# Altium PCB Motor_control.PcbDoc
Units mm, origin at the board's own origin, x right, y up, seen from the top; angles counter-clockwise.
Board outline 53.5 x 101.6 mm, 2 copper layers (Top Layer, Bottom Layer); 26 components, 36 nets, 158 pads, 7 vias.
Unrouted connection lines stored in the file: 2.
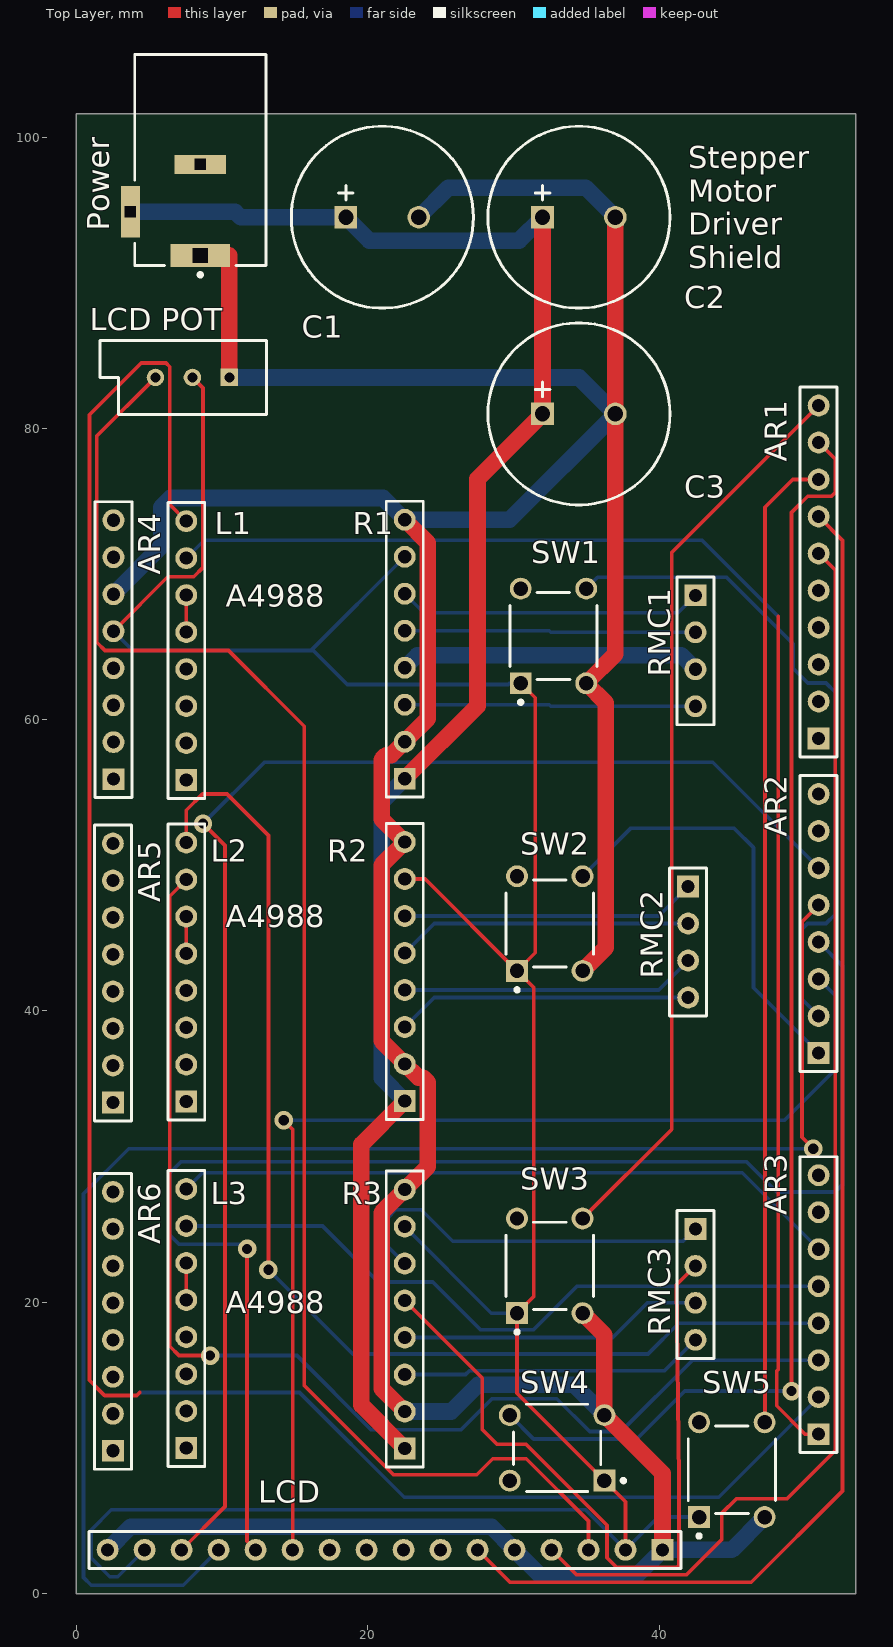
[diagram p0: Top Layer view]
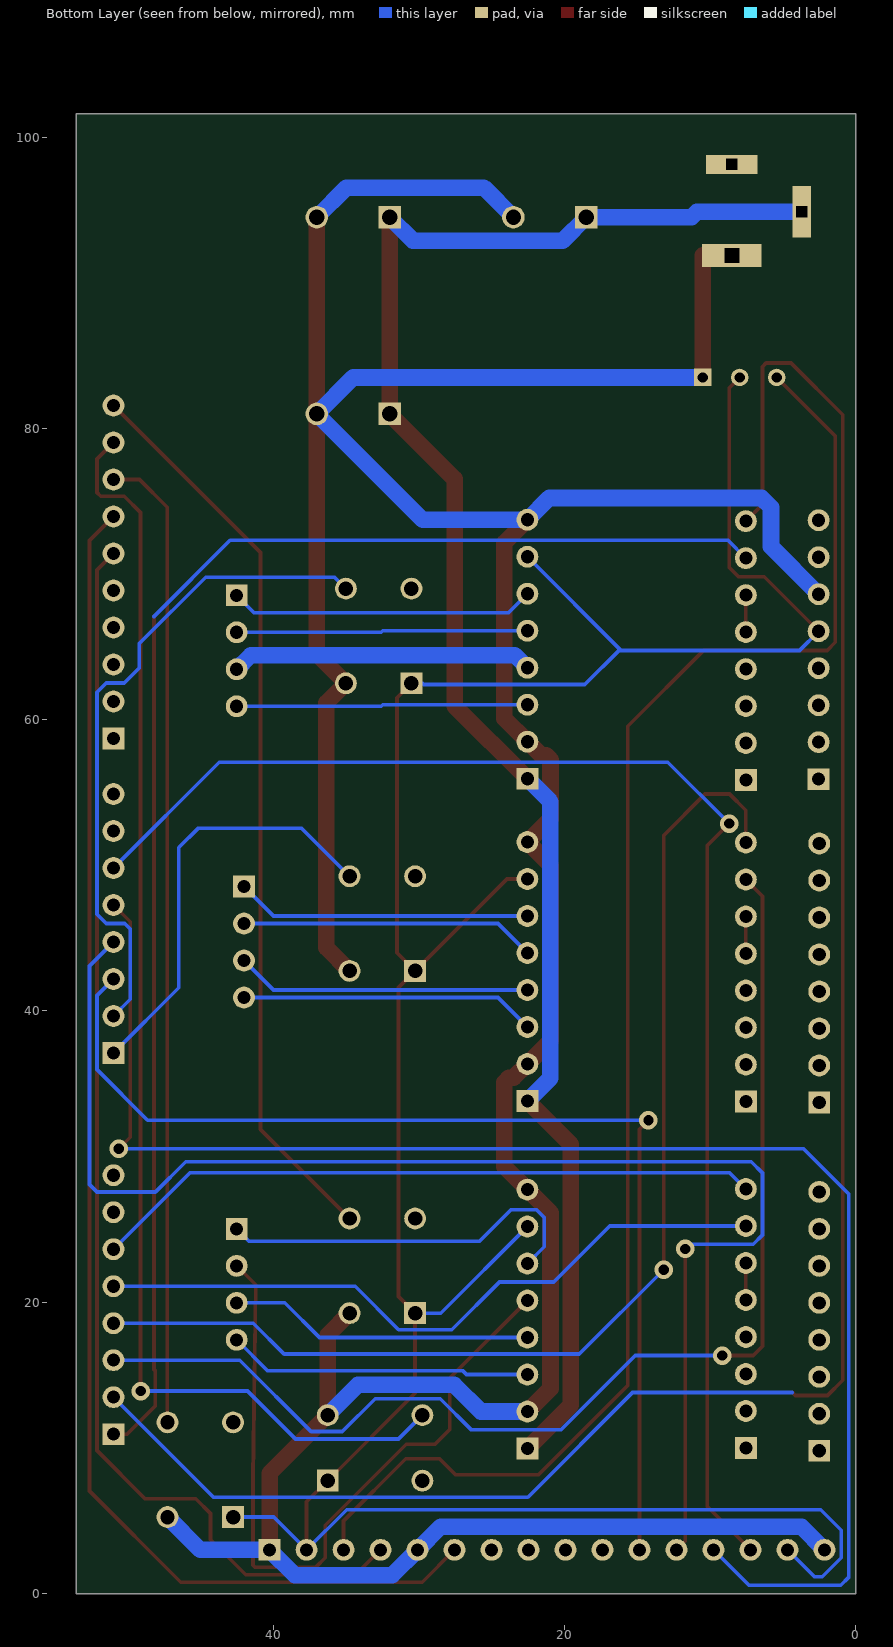
[diagram p1: Bottom Layer view, seen from below]

## Layer stack, top to bottom
Top Solder: solder mask 0.0102, Solder Resist, Dk 3.5
Top Layer: signal copper 0.0356
Dielectric 1: dielectric 0.32, FR-4, Dk 4.8
Bottom Layer: signal copper 0.0356
Bottom Solder: solder mask 0.0102, Solder Resist, Dk 3.5

## Board outline
0,0 53.5,0 53.5,101.6 0,101.6

## Design rules (kind name [scope] priority, off if disabled: settings)
Clearance [All] p1: gap=0.254 ignorepadtopadclearanceinfootprint=FALSE except(0: Arc-Hole Track-Hole SMDPad-Hole THPad-Hole Via-Hole Fill-Hole Poly-Hole Region-Hole Text-Hole)
PolygonConnect [All] p1: connectstyle=Relief reliefconductorwidth=0.254 reliefentries=4 polygonreliefangle="90 Angle" airgapwidth=0.254
RoomDefinition "Motor_control Schematic" [InComponentClass('Motor_control Schematic')] p1: confinementstyle=ConfineIn formatcopy=TRUE lockcomponents=FALSE outline 151.943,0.924 348.539,0.924 348.539,29.372 151.943,29.372
RoutingVias [All] p1: holewidth=0.711 width=1.27 viastyle="Through Hole" minholewidth=0.711 minwidth=1.27 maxholewidth=0.711 maxwidth=1.27
SolderMaskExpansion [All] p1: expansion=0.102 istentingtop=FALSE
Width "Schematic Width Constraint_12" [InNet('NetR2_6')] p1: maxlimit=1.143 minlimit=1.143 preferedwidth=1.143
Width "Schematic Width Constraint_11" [InNet('NetR1_4')] p2: maxlimit=1.143 minlimit=1.143 preferedwidth=1.143
Width "Schematic Width Constraint_10" [InNet('NetR3_4')] p3: maxlimit=1.143 minlimit=1.143 preferedwidth=1.143
Width "Schematic Width Constraint_9" [InNet('NetR3_6')] p4: maxlimit=1.143 minlimit=1.143 preferedwidth=1.143
Width "Schematic Width Constraint_8" [InNet('NetR2_4')] p5: maxlimit=1.143 minlimit=1.143 preferedwidth=1.143
Width "Schematic Width Constraint_7" [InNet('NetR3_5')] p6: maxlimit=1.143 minlimit=1.143 preferedwidth=1.143
Width "Schematic Width Constraint_6" [InNet('NetR2_5')] p7: maxlimit=1.143 minlimit=1.143 preferedwidth=1.143
Width "Schematic Width Constraint_5" [InNet('NetR3_3')] p8: maxlimit=1.143 minlimit=1.143 preferedwidth=1.143
Width "Schematic Width Constraint_3" [InNet('NetR1_5')] p9: maxlimit=1.143 minlimit=1.143 preferedwidth=1.143
Width "Schematic Width Constraint_2" [InNet('NetC1_1')] p10: maxlimit=1.143 minlimit=1.143 preferedwidth=1.143
Width "Schematic Width Constraint_1" [InNet('NetC1_1')] p11: maxlimit=0.254 minlimit=1.143 preferedwidth=1.143
Width "Schematic Width Constraint" [InNet('GND')] p12: maxlimit=0.254 minlimit=1.143 preferedwidth=1.143
Width [All] p13: maxlimit=0.254 minlimit=0.254 preferedwidth=0.254
30 further rules are at their usual default settings.

## Components (designator, comment, footprint, x,y, rotation, side; value= is the part's Value field where it differs from the comment)
AR1 "Header 10" HDR1X10 50.96,58.71 r90 top
AR2 "Header 8" HDR1X8 50.96,37.114 r90 top
AR3 "Header 8" HDR1X8 50.96,10.941 r90 top
AR4 "Header 8" HDR1X8 2.54,55.915 r90 top
AR5 "Header 8" HDR1X8 2.5,33.72 r90 top
AR6 "Header 8" HDR1X8 2.5,9.8 r90 top
C1 "47uF" NIC-UHE-12.5x31.5-2_V 21,94.5 r0 top
C2 "47uF" NIC-UHE-12.5x31.5-2_V 34.5,94.5 r0 top
C3 "47uF" NIC-UHE-12.5x31.5-2_V 34.5,81 r0 top
L1 "Header 8" HDR1X8 7.54,55.852 r90 top
L2 "Header 8" HDR1X8 7.54,33.781 r90 top
L3 "Header 8" HDR1X8 7.54,9.995 r90 top
LCD "Header 16" HDR1X16 40.24,3 r180 top
"LCD POT" "RPot" VR5 7.96,83.5 r180 top value=1K (schematic designator POT)
Power "RAPC712X" SWITCH-RAPC712X-3_V 8.5,95 r180 top
R1 "Header 8" HDR1X8 22.54,55.948 r90 top
R2 "Header 8" HDR1X8 22.54,33.819 r90 top
R3 "Header 8" HDR1X8 22.54,9.955 r90 top
RMC1 "Header 4" HDR1X4 42.5,68.54 r270 top
RMC2 "Header 4" HDR1X4 42,48.54 r270 top
RMC3 "Header 4" HDR1X4 42.5,25.04 r270 top
SW1 "1825910-6" TECO-1825910-6_V 32.75,65.75 r90 top
SW2 "1825910-6" TECO-1825910-6_V 32.5,46 r90 top
SW3 "1825910-6" TECO-1825910-6_V 32.5,22.5 r90 top
SW4 "1825910-6" TECO-1825910-6_V 33,10 r180 top
SW5 "1825910-6" TECO-1825910-6_V 45,8.5 r90 top

## Footprints (in the part's own frame and the unit in brackets; to place one, negate y for a bottom-side part, rotate by r counter-clockwise, add the part's x,y. Pads: shape width x height; smd on the part's side, far side on the other; paste and mask are expansions set on the pad)
HDR1X4 [mm] "Connector; Header; 4 Position"
  rect 1.5x1.5 hole 0.9: 1(0,0)
  round 1.5 hole 0.9: 2(2.54,0) 3(5.08,0) 4(7.62,0)
  silkscreen extent -1.27,-1.27 8.89,1.27
HDR1X8 [mm] "Connector; Header; 8 Position"
  rect 1.5x1.5 hole 0.9: 1(0,0)
  round 1.5 hole 0.9: 2(2.54,0) 3(5.08,0) 4(7.62,0) 5(10.16,0) 6(12.7,0) 7(15.24,0) 8(17.78,0)
  silkscreen extent -1.27,-1.27 19.05,1.27
HDR1X10 [mm] "Connector; Header; 10 Position"
  rect 1.5x1.5 hole 0.9: 1(0,0)
  round 1.5 hole 0.9: 2(2.54,0) 3(5.08,0) 4(7.62,0) 5(10.16,0) 6(12.7,0) 7(15.24,0) 8(17.78,0) 9(20.32,0) 10(22.86,0)
  silkscreen extent -1.27,-1.27 24.13,1.27
HDR1X16 [mm] "Connector; Header; 16 Position"
  rect 1.5x1.5 hole 0.9: 1(0,0)
  round 1.5 hole 0.9: 2(2.54,0) 3(5.08,0) 4(7.62,0) 5(10.16,0) 6(12.7,0) 7(15.24,0) 8(17.78,0) 9(20.32,0) 10(22.86,0) 11(25.4,0) 12(27.94,0) 13(30.48,0) 14(33.02,0) 15(35.56,0) 16(38.1,0)
  silkscreen extent -1.27,-1.27 39.37,1.27
NIC-UHE-12.5x31.5-2_V [mm] "THD, 2-Leads, Dia 12.5mm, Body Length 31.5mm, Pin Spacing 5mm"
  rect 1.55x1.55 hole 1.05: 1(-2.5,0)
  round 1.55 hole 1.05: 2(2.5,0)
  silkscreen extent -6.25,-6.25 6.25,6.25, body extent -6.25,-6.25 6.25,6.25, height 33.5
SWITCH-RAPC712X-3_V [mm] "CONN, 3-Leads, Body 14.5x9mm"
  rect 4.1x1.55 hole 1.01 square: 1(0,3.125)
  rect 3.55x1.3 hole 0.76 square: 2(0,-3.125)
  rect 1.3x3.55 hole 0.76 square: 3(4.8,0.125)
  silkscreen extent -4.5,-10.68 4.5,4.57, body extent -4.5,-10.68 4.5,3.83, height 11
TECO-1825910-6_V [mm] "Switch, 4-Leads, Body 5.99x5.99mm"
  rect 1.5x1.5 hole 0.99: 1(-3.25,2.25)
  round 1.5 hole 0.99: 2(3.25,2.25) 3(-3.25,-2.25) 4(3.25,-2.25)
  silkscreen extent -4.67,-3 2.99,3, body extent -3,-2.99 2.99,3, height 5
VR5 [mm] "Thru-Hole; 3 Leads"
  rect 1.2x1.2 hole 0.7: 1(-2.54,0)
  round 1.2 hole 0.7: 2(0,0) 3(2.54,0)
  silkscreen extent -5.08,-2.54 6.35,2.54

## Part data
AR1: "Header, 10-Pin", LatestRevisionDate=17-Jul-2002, LatestRevisionNote="Re-released for DXP Platform.", Publisher="Altium Limited"
AR2 AR3 AR4 AR5 AR6 L1 L2 L3 R1 R2 R3: "Header, 8-Pin", LatestRevisionDate=17-Jul-2002, LatestRevisionNote="Re-released for DXP Platform.", Publisher="Altium Limited"
C1 C2 C3: library part CMP-1253-00001-1, "Aluminum Electrolytic Capacitor, 680 uF +/-20%, 50 V, -40 to 105 degC, 2-Pin THD, RoHS, Bulk", Capacitance Tolerance=+/-20%, Manufacturer=Nichicon, PartNumber=UHE1H681MHD, Rated Capacitance="680 uF", Rated Voltage="50 V", Temperature Range="-40 to 105 degC", ComponentLink1Description="Manufacturer URL", ComponentLink1URL=http://www.nichicon.co.jp/, ComponentLink2Description=Datasheet, ComponentLink2URL=http://nichicon-us.com/english/products/pdfs/e-he.pdf, ComponentLink3Description="Package Specification", ComponentLink3URL=http://nichicon-us.com/english/products/pdfs/e-he.pdf, DatasheetVersion=Sep-13, Mounting Technology="Through Hole", PackageDescription="2-Pin Through Hole Device, Dia 12.5 mm, Body Length 31.5 mm, Pin Spacing 5 mm", Packing=Bulk, Rated Ripple="2310 mA", RoHS=TRUE
LCD: "Header, 16-Pin", LatestRevisionDate=17-Jul-2002, LatestRevisionNote="Re-released for DXP Platform.", Publisher="Altium Limited"
"LCD POT": "Potentiometer", LatestRevisionDate=17-Jul-2002, LatestRevisionNote="Re-released for DXP Platform.", PackageDescription="Variable Resistor, Thru-Hole; 3 Leads", PackageReference=VR5, Published=8-Jun-2000, Publisher="Altium Limited", Set Position=0.5, Sim Note="Enter the Resistance value and the set point into parameter fields."
Power: library part CMP-2000-05383-1, "Conn Powerjack Mini R/A PCMT, 5 A, 3-Pin THD, RoHS", Color=Black, Current Rating=5A, Manufacturer=Switchcraft, Standard Package=2,500, Catalog Drawings="RAPC7(1,2)2XSide /  / RAPC7(1,2)2XTop", Category=Connectors,Interconnects, Connector Type=Jack, Contact Material=Brass, Contact Material - Plating=Nickel, Datasheet URL=https://datasheet.ciiva.com/391/rapc712x-cd-391666.pdf, Datasheet Version="Rev. A, 08/2005", Dynamic Catalog=SwitchcraftInc, Family=Barrel-PowerConnectors, Gender=Male, Housing Color=Black, Housing Material=Thermoplastic, Internal Switch(s)=SingleSwitch,NormallyClosed, Manufacturer URL=http://www.switchcraft.com/, Mating Products="SC1539-ND / -CONNPLUGMINIPWR2CONDBLK/RED / SC1051-ND / -CONNPLUGMINIPOWER2CONDBLACK", Mounting Type=ThroughHole,RightAngle, Number of Positions/Contacts=2Conductors,2Contacts, Other Names="Q2387461 / Q2526383 / RAPC712X-ND / SC237", Plug/Mating Plug Diameter=2.5mmID,5.5mmOD, RoHS Information=SwitchcraftRoHSInfo, Shielding=Unshielded, Termination=SolderEyelet(s)
RMC1 RMC2 RMC3: "Header, 4-Pin", LatestRevisionDate=17-Jul-2002, LatestRevisionNote="Re-released for DXP Platform.", Publisher="Altium Limited"
SW1 SW2 SW3 SW4 SW5: library part CMP-1684-00021-1, "Tact Switch, SPST-NO, 0.05 A, -35 to 85 degC, 4-Pin THD, RoHS, Bulk", Actuator Color=Black, Contact Rating @ Voltage=0.05A@24VDC, Dielectric Strength=500VAC, Manufacturer="TE Connectivity", Maximum AC Voltage Rating=N/A, Maximum Contact Resistance=100mOhm, Maximum DC Voltage Rating=24V, Minimum Insulation Resistance=100MOhm, Operating Temperature=-35to85C, Package Description="4-Pin Through Hole Device, Body 5.99 x 5.99 mm, Pitch 6.5 mm", Package Reference=THD, Actuator Length=1.4mm, Actuator Material=PolybutyleneTerephthalate, Actuator Style=RoundButton, Base Material=N/A, Body Orientation=Straight, Bushing Type=Unthreaded, Contact Material=CopperAlloy, Contact Plating=Silver, Datasheet URL=http://www.te.com/commerce/DocumentDelivery/DDEController?Action=showdoc&DocId=Customer+Drawing%7F1825910%7FC9%7Fpdf%7FEnglish%7FENG_CD_1825910_C9.pdf%7F1825910-6, Datasheet Version="Rev. C9", Dimension=5.99x5mm, Electrical Life=100000Cycles, Family=1825910, Function=MomentaryContact, Housing Material=N/A, Illumination=N/R, Manufacturer URL=http://www.te.com, Mechanical Life=100000Cycles, Mounting=ThroughHole, Packaging=N/A, Part No=1825910-6, Pole Throw Configuration=SPST, Product Weight=N/A, RoHS=Yes, Seal Description=N/A, Seal Location=N/A, Switch Configuration=OFF(ON), Terminal Type=PCPins, Thread Size=N/R

## Via types
v1: diameter 1.27, hole 0.711, Top Layer to Bottom Layer, 7 vias

## Nets (pads, with @x,y where several pads share a name; then routed paths per layer and width w, separated by ;. In a path a pad name is that pad's centre, name@x,y a point inside that pad or via, vN(x,y) a via of type N, cw(c..) or ccw(c..) an arc to the next point about the centre after c; other vN are vias at no path point)
GND: "LCD POT.1" AR4.6 C1.2 C2.2 C3.2 LCD.1 LCD.5 LCD.16 Power.1 R1.2 R1.8 R2.2 R2.8 R3.2 R3.8 SW1.3 SW2.3 SW3.3 SW4.3 SW5.3 | length 300.2
  Top Layer w1.143: Power.1 10.5,91.875 10.5,83.5 ; R3.2 20.955,14.08 20.955,26.15 R3.8 24.13,29.325 24.13,35.087 23.8,35.417 23.482,35.417 R2.2 20.955,37.944 20.955,50.014 R2.8 20.955,53.184 20.955,57.259 21.26,57.564 21.616,57.564 R1.2 24.13,60.078 24.13,72.138 R1.8 ; SW3.3 36.25,17.75 SW4.3 40.24,8.26 LCD.1 ; SW2.3 36.348,44.348 36.348,61.152 SW1.3 37,64.5 C3.2 C2.2
  Bottom Layer w1.143: LCD.16 3.722,4.582 28.498,4.582 LCD.5 31.826,1.254 38.494,1.254 LCD.1 45,3 SW5.3 ; AR4.6 5.817,71.892 5.817,74.584 6.452,75.219 21.049,75.219 R1.8 29.728,73.728 C3.2 34.5,83.5 10.5,83.5 ; R3.2 25.732,12.495 27.571,14.334 34.167,14.334 SW4.3 ; C1.2 25.53,96.53 34.97,96.53 C2.2
NetAR1_6: AR1.6 LCD.4 | length 86.8
  Top Layer w0.254: LCD.4 34.337,1.283 41.885,1.283 44.298,3.696 44.298,5.496 45.314,6.512 48.794,6.512 52.096,9.814 52.096,70.274 AR1.6
NetAR1_7: AR1.7 LCD.6 | length 96.2
  Top Layer w0.254: LCD.6 29.765,0.775 46.333,0.775 52.604,7.045 52.604,72.306 AR1.7
NetAR1_8: AR1.8 SW5.4 | length 67.3
  Top Layer w0.254: SW5.4 47.27,11.77 47.27,74.584 49.175,76.49 AR1.8
NetAR1_9: AR1.9 SW4.4 | length 89.2
  Top Layer w0.254: v1(49.098,13.903) 49.098,74.228 50.216,75.346 51.842,75.346 52.096,75.6 52.096,77.894 AR1.9
  Bottom Layer w0.254: SW4.4 31.389,10.611 38.465,10.611 41.758,13.903 v1(49.098,13.903)
NetAR1_10: AR1.10 SW3.4 | length 62.5
  Top Layer w0.254: SW3.4 40.869,31.869 40.869,71.478 AR1.10
NetAR2_1: AR2.1 SW2.4 | length 29.6
  Bottom Layer w0.254: SW2.4 38.037,52.537 45.161,52.537 46.482,51.216 46.482,41.592 AR2.1
NetAR2_2: AR2.2 SW1.4 | length 46.1
  Bottom Layer w0.254: SW1.4 35.783,69.783 44.628,69.783 49.2,65.211 49.2,63.535 50.216,62.519 51.461,62.519 52.096,61.884 52.096,46.644 51.461,46.009 50.191,46.009 49.81,45.628 49.81,40.804 AR2.2
NetAR2_3: AR2.3 LCD.11 | length 75.8
  Top Layer w0.254: v1(14.224,32.496) 14.84,31.88 LCD.11
  Bottom Layer w0.254: v1(14.224,32.496) 48.616,32.496 52.096,35.976 52.096,41.058 AR2.3
NetAR2_4: AR2.4 LCD.12 | length 95.8
  Top Layer w0.254: v1(11.71,23.657) 11.71,3.59 LCD.12
  Bottom Layer w0.254: v1(11.71,23.657) 11.379,23.987 7.036,23.987 6.401,24.622 6.401,28.88 7.172,29.651 46,29.651 48.082,27.569 52.096,27.569 52.604,28.077 52.604,43.09 AR2.4
NetAR2_5: AR2.5 LCD.13 | length 105.8
  Top Layer w0.254: v1(50.597,30.54) 49.81,31.328 49.81,46.123 AR2.5
  Bottom Layer w0.254: LCD.13 7.328,0.568 1.016,0.568 0.483,1.102 0.483,27.442 3.582,30.54 v1(50.597,30.54)
NetAR2_6: AR2.6 LCD.14 | length 98.8
  Top Layer w0.254: LCD.14 10.195,5.975 10.195,51.359 v1(8.687,52.867)
  Bottom Layer w0.254: v1(8.687,52.867) 12.903,57.083 43.69,57.083 AR2.6
NetAR3_1: AR3.1 L1.7 | length 101.3
  Top Layer w0.254: 48.184,67.091 48.184,15.377 48.082,15.275 48.082,12.887 50.029,10.941 AR3.1
  Bottom Layer w0.254: L1.7 8.771,72.323 42.952,72.323 48.184,67.091
NetAR3_2: AR3.2 L1.8 | length 140.9
  Top Layer w0.254: 4.344,13.802 4.14,13.599 1.931,13.599 0.889,14.64 0.889,80.934 4.445,84.49 6.147,84.49 6.401,84.236 6.401,74.771 L1.8
  Bottom Layer w0.254: 4.344,13.802 15.316,13.802 22.505,6.614 44.093,6.614 AR3.2
NetAR3_3: AR3.3 L2.7 | length 83.3
  Top Layer w0.254: L2.7 6.401,47.882 6.401,16.977 7.036,16.342 v1(9.17,16.342)
  Bottom Layer w0.254: v1(9.17,16.342) 15.139,16.342 20.244,11.236 26.38,11.236 28.524,13.381 32.984,13.381 35.246,11.119 37.389,11.119 42.291,16.021 AR3.3
NetAR3_4: AR3.4 L2.8 | length 80.4
  Top Layer w0.254: L2.8 7.54,53.777 8.662,54.899 10.338,54.899 13.183,52.054 v1(13.183,22.235)
  Bottom Layer w0.254: v1(13.183,22.235) 18.974,16.443 39.244,16.443 41.361,18.561 AR3.4
NetAR3_5: AR3.5 L3.7 | length 47.6
  Bottom Layer w0.254: L3.7 16.888,25.235 20.727,21.396 24.46,21.396 27.738,18.119 31.381,18.119 34.363,21.101 AR3.5
NetAR3_6: AR3.6 L3.8 | length 46.1
  Bottom Layer w0.254: L3.8 8.655,28.889 45.712,28.889 AR3.6
NetAR4_5: "LCD POT.2" AR4.5 LCD.2 LCD.15 R1.7 R2.7 R3.7 SW1.1 SW2.1 SW3.1 SW4.1 SW5.1 | length 196.2
  Top Layer w0.254: AR4.5 6.274,69.809 8.052,69.809 8.687,70.444 8.687,82.773 7.96,83.5 ; R2.7 23.941,49.059 SW2.1 ; SW1.1 31.496,61.504 31.496,43.996 SW2.1 ; LCD.2 37.7,6.3 SW4.1 30.25,13.75 SW3.1 31.395,20.395 31.395,41.605 SW2.1
  Bottom Layer w0.254: AR4.5 3.861,64.754 16.106,64.754 ; LCD.15 2.833,1.153 2.286,1.153 0.991,2.448 0.991,4.348 2.393,5.75 34.95,5.75 LCD.2 39.95,5.25 SW5.1 ; R3.7 28.485,19.25 SW3.1 ; R1.7 16.106,64.754 ; SW1.1 29.725,62.5 29.642,62.417 18.593,62.417 16.256,64.754 16.106,64.754
NetC1_1: C1.1 C2.1 C3.1 Power.3 R1.1 R2.1 R3.1 | length 122
  Top Layer w1.143: R3.1 19.558,12.937 19.558,30.837 R2.1 ; R1.1 27.534,60.942 27.534,76.534 C3.1 C2.1
  Bottom Layer w1.143: Power.3 10.897,94.875 11.272,94.5 C1.1 20.103,92.897 30.397,92.897 C2.1 ; R2.1 20.964,35.395 20.964,54.372 R1.1
NetL1_5: L1.5 L1.6 | length 2.5
  Top Layer w0.254: L1.5 L1.6
NetL2_5: L2.5 L2.6 | length 2.5
  Top Layer w0.254: L2.5 L2.6
NetL3_5: L3.5 L3.6 | length 2.5
  Top Layer w0.254: L3.5 L3.6
NetLCD_3: "LCD POT.3" LCD.3 | length 108
  Top Layer w0.254: 5.42,83.5 1.397,79.477 1.397,65.313 1.956,64.754 10.44,64.754 15.647,59.547 15.647,14.284 21.768,8.163 27.483,8.163 28.575,9.255 30.887,9.255 35.16,4.982 LCD.3
NetR1_3: R1.3 RMC1.4 | length 20
  Bottom Layer w0.254: R1.3 32.461,61.028 32.569,60.92 RMC1.4
NetR1_4: R1.4 RMC1.3 | length 20.7
  Bottom Layer w1.143: R1.4 23.396,64.424 41.536,64.424 RMC1.3
NetR1_5: R1.5 RMC1.2 | length 20
  Bottom Layer w0.254: R1.5 32.461,66.108 32.569,66 RMC1.2
NetR1_6: R1.6 RMC1.1 | length 21
  Bottom Layer w0.254: R1.6 23.843,67.345 41.305,67.345 RMC1.1
NetR2_3: R2.3 RMC2.4 | length 20.3
  Bottom Layer w0.254: R2.3 24.561,40.92 RMC2.4
NetR2_4: R2.4 RMC2.3 | length 20.3
  Bottom Layer w0.254: R2.4 39.979,41.439 RMC2.3
NetR2_5: R2.5 RMC2.2 | length 20.3
  Bottom Layer w0.254: R2.5 24.561,46 RMC2.2
NetR2_6: R2.6 RMC2.1 | length 20.3
  Bottom Layer w0.254: R2.6 39.979,46.519 RMC2.1
NetR3_3: R3.3 RMC3.4 | length 20.9
  Bottom Layer w0.254: R3.3 26.714,15.035 26.965,15.286 40.366,15.286 RMC3.4
NetR3_4: R3.4 RMC3.3 | length 20.9
  Bottom Layer w0.254: R3.4 36.819,17.575 39.204,19.96 RMC3.3
NetR3_5: R3.5 RMC3.2 | length 51
  Top Layer w0.254: R3.5 27.864,14.791 27.864,11.262 28.88,10.246 30.861,10.246 36.424,4.683 36.424,2.448 37.059,1.813 41.189,1.813 41.189,1.802 41.239,1.802 41.377,1.94 41.377,7.884 41.199,21.199 RMC3.2
NetR3_6: R3.6 RMC3.1 | length 26.2
  Bottom Layer w0.254: R3.6 21.387,23.808 21.387,25.816 21.92,26.349 23.673,26.349 25.832,24.19 41.65,24.19 RMC3.1
pads on no net: AR1.1 AR1.2 AR1.3 AR1.4 AR1.5 AR2.7 AR2.8 AR3.7 AR3.8 AR4.1 AR4.2 AR4.3 AR4.4 AR4.7 AR4.8 AR5.1 AR5.2 AR5.3 AR5.4 AR5.5 AR5.6 AR5.7 AR5.8 AR6.1 AR6.2 AR6.3 AR6.4 AR6.5 AR6.6 AR6.7 AR6.8 L1.1 L1.2 L1.3 L1.4 L2.1 L2.2 L2.3 L2.4 L3.1 L3.2 L3.3 L3.4 LCD.7 LCD.8 LCD.9 LCD.10 Power.2 SW1.2 SW2.2 SW3.2 SW4.2 SW5.2

## Silkscreen, mask and mechanical layers (free items; w line width, h text height)
Top Overlay:
  text "Stepper / Motor / Driver / Shield" at 42,91 h1.52
  text "A4988" at 10.254,67.754 h1.52
  text "A4988" at 10.254,45.754 h1.52
  text "A4988" at 10.254,19.254 h1.52
Mechanical 1:
  text "47uF" at 18.754,84.754 h1.52